# Altium PCB Final_back_up.PcbDoc
Units mm, origin at the board's own origin, x right, y up, seen from the top; angles counter-clockwise.
Board outline 52.21 x 45.1 mm, 2 copper layers (Top Layer, Bottom Layer); 32 components, 17 nets, 94 pads, 116 vias.
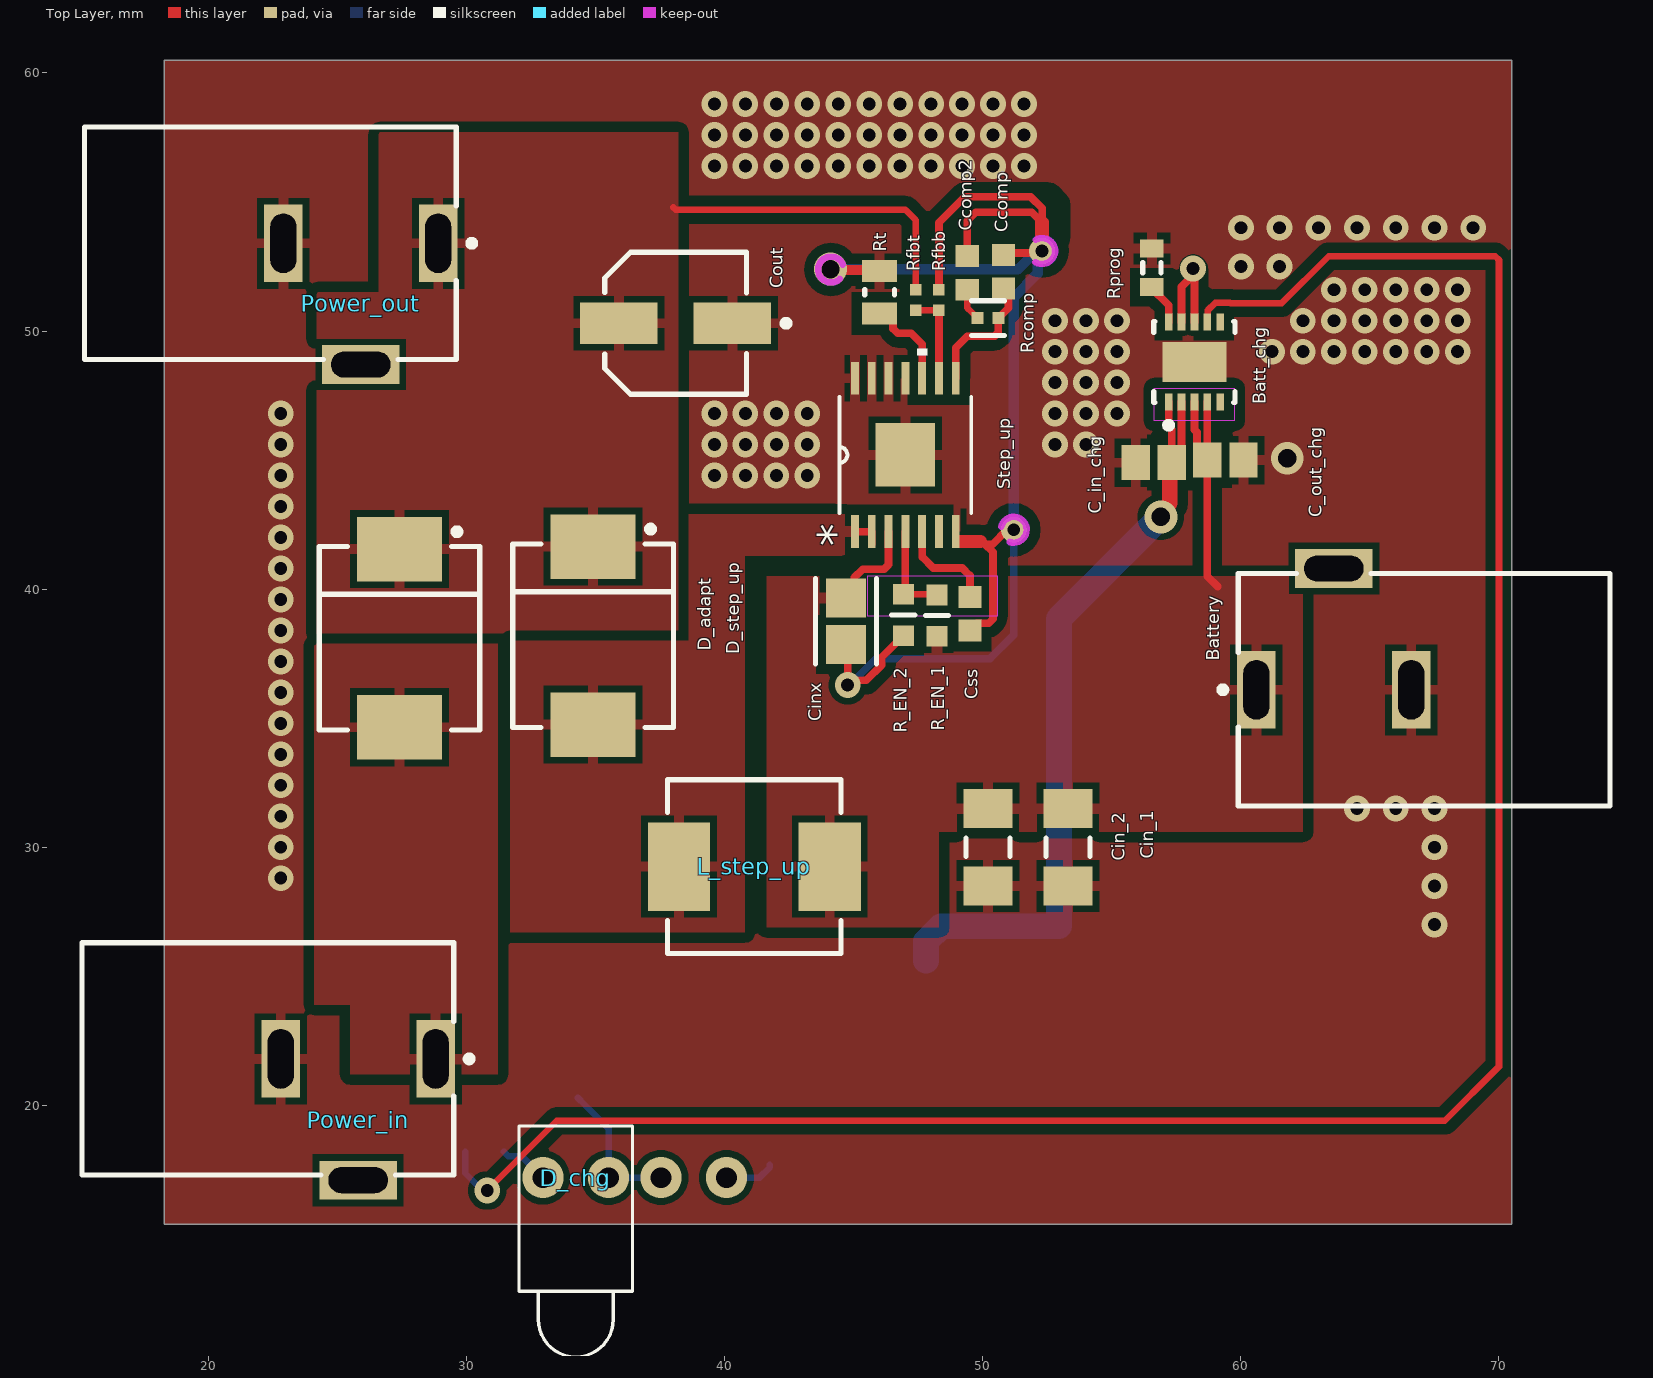
[diagram p0: Top Layer view]
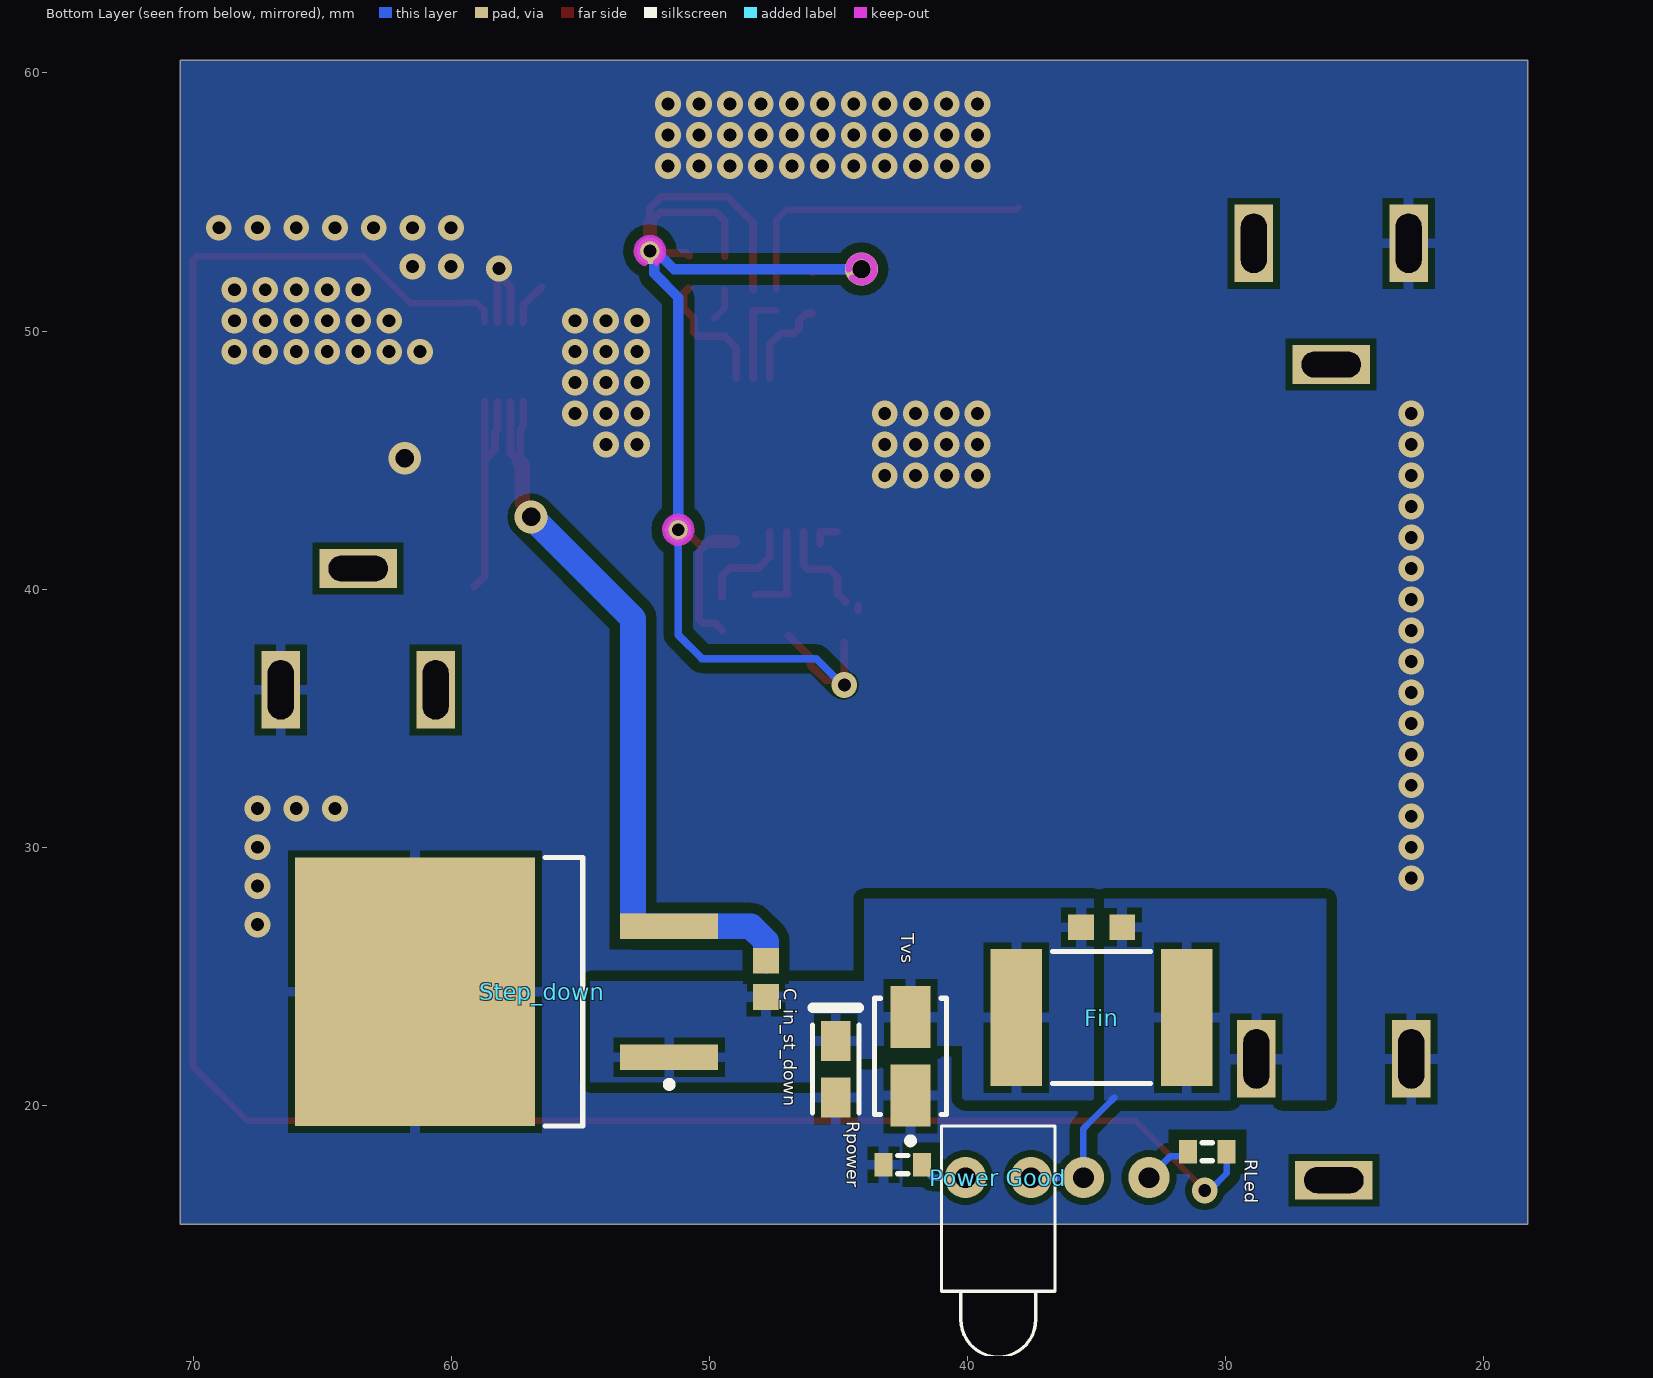
[diagram p1: Bottom Layer view, seen from below]

## Layer stack, top to bottom
Top Solder: solder mask 0.0102, Solder Resist, Dk 3.5
Top Layer: signal copper 0.0356
Dielectric 1: dielectric 0.32, FR-4, Dk 4.8
Bottom Layer: signal copper 0.0356
Bottom Solder: solder mask 0.0102, Solder Resist, Dk 3.5

## Board outline
18.288,15.4 70.5,15.4 70.5,60.5 18.288,60.5

## Design rules (kind name [scope] priority, off if disabled: settings)
Clearance [All] p1: gap=0.254 ignorepadtopadclearanceinfootprint=TRUE except(0: Text-Hole; 0.2: Arc-Arc Arc-Track Arc-SMDPad Track-Track Track-SMDPad SMDPad-SMDPad; 0.4: Arc-Fill Arc-Poly Arc-Region Track-Fill Track-Poly Track-Region SMDPad-Fill SMDPad-Poly SMDPad-Region Fill-Fill Fill-Poly Fill-Region Poly-Poly Poly-Region Region-Region)
PolygonConnect For_TOP_GND [HasFootprint('FP-C04-063-MFG')] p1: connectstyle=Direct reliefconductorwidth=0.254 reliefentries=4 polygonreliefangle="90 Angle" airgapwidth=0.254
PolygonConnect [All] p2: thpad.connectstyle=Relief thpad.reliefconductorwidth=0.4 thpad.reliefentries=4 thpad.polygonreliefangle="90 Angle" thpad.airgapwidth=0.254 smdpad.connectstyle=Relief smdpad.reliefconductorwidth=0.4 smdpad.reliefentries=4 smdpad.polygonreliefangle="90 Angle" smdpad.airgapwidth=0.254 via.connectstyle=Direct via.reliefconductorwidth=0.4 via.reliefentries=4 via.polygonreliefangle="90 Angle" via.airgapwidth=0.254
RoutingVias [All] p1: holewidth=0.711 width=1.27 viastyle="Through Hole" minholewidth=0.711 minwidth=1.27 maxholewidth=0.711 maxwidth=1.27
SolderMaskExpansion [All] p1: expansion=0.102 istentingtop=FALSE
Width [All] p1: maxlimit=2 minlimit=0.254 preferedwidth=0.254 minimp=50.000000 maximp=50.000000 favimp=50.000000
30 further rules are at their usual default settings.

## Components (designator, comment, footprint, x,y, rotation, side; value= is the part's Value field where it differs from the comment)
Batt_chg "MCP73213-A6SI/MF" FP-C04-063-MFG 58.2,48.8 r90 top
Battery "PJ-102BH" CUI-PJ-102BH_V 63.6,36.1 r0 top
C_in_chg "1uF (25V)" CAPC2013X140X50LL20T25 56.625,44.9 r0 top
C_in_st_down "T491A475K016AT" KEMT-A-3216-18-2_L 45.1,21.4 r270 bottom
C_out_chg "1uF (25V)" CAPC2013X140X50LL20T25 59.4,45 r180 top
Ccomp "06035C102KAT2A" CAPC1608X90X35LL15T15 50.8,52.3 r270 top
Ccomp2 "06035C102KAT2A" CAPC1608X90X35LL15T15 49.4,52.25 r270 top
Cin_1 "C1206C106K4RACTU" CAPC3216X180X50ML20T25 53.3,30 r90 top
Cin_2 "C1206C106K4RACTU" CAPC3216X180X50ML20T25 50.2,30 r90 top
Cinx "C0805C104M5RACTU" FP-C0805C-DN-IPC_A 44.7,38.75 r270 top value="0.10 μF"
Cout "2R5SVPE330MY" FP-SVPE-B6-MFG 38.1,50.3 r180 top value=330uF
Css "06035C102KAT2A" CAPC1608X90X35LL15T15 49.5,39.05 r90 top
D_adapt "B540C-13-F" FP-SMC-MFG 27.4,38.1 r270 top value=300pF
D_chg "LED1" LED-1 34.23,17.2 r270 top
D_step_up "B540C-13-F" FP-SMC-MFG 34.9,38.2 r270 top value=300pF
Fin "2920L150DR" LFUS-2920L150DR_V 34.8,23.4 r0 bottom
L_step_up "IHLP2525CZER3R3M01" FP-IHLP-2525CZ-FP_2_413x3-MFG 41.15,29.25 r180 top
"Power Good" "LED1" LED-1 38.8,17.2 r270 bottom
Power_in "PJ-102BH" CUI-PJ-102BH_V 25.8,21.8 r180 top
Power_out "PJ-102BH" CUI-PJ-102BH_V 25.9,53.4 r180 top
R_EN_1 "RC1608F9093CS" FP-RC1608-MFG 48.225,38.975 r270 top
R_EN_2 "RC1608F9093CS" FP-RC1608-MFG 46.925,39 r90 top
Rcomp "CRCW04020000Z0ED" FP-CRCW0402-e3-IPC_C 50.2,50.5 r180 top
Rfbb "ERJ2RKF1002X" RESC1005X40X25LL05T05 48.3,51.2 r270 top
Rfbt "ERJ2RKF1002X" RESC1005X40X25LL05T05 47.4,51.2 r90 top
RLed "1K" J1-0603 30.7,18.2 r180 bottom
Rpower "1K" J1-0603 42.5,17.7 r0 bottom
Rprog "3K" J1-0603 56.55,52.45 r90 top value=1K
Rt "CRCW08050000Z0EA" RESC2013X50X30LL20T20 46,51.5 r270 top
Step_down "L7808CD2T-TR" TO-263_N 57.85,24.4 r0 bottom
Step_up "TPS55340PWP" PWP14 47,45.2 r90 top
Tvs "SMAJ14CA-E3/61" VISH-DO-214AC-2_N 42.2,21.9 r90 bottom

## Footprints (in the part's own frame and the unit in brackets; to place one, negate y for a bottom-side part, rotate by r counter-clockwise, add the part's x,y. Pads: shape width x height; smd on the part's side, far side on the other; paste and mask are expansions set on the pad)
CAPC1608X90X35LL15T15 [mm] "Chip Capacitor, 2-Leads, Body 1.60x0.81mm, IPC High Density"
  rect 0.85x0.9 smd: 1(-0.65,0) 2(0.65,0)
  body extent -0.88,-0.48 0.87,0.48, height 0.9
CAPC2013X140X50LL20T25 [mm] "Chip Capacitor, 2-Leads, Body 2.00x1.25mm, IPC High Density"
  rect 1.1x1.35 smd: 1(-0.7,0) 2(0.7,0)
  body extent -1.1,-0.72 1.1,0.72, height 1.4
CAPC3216X180X50ML20T25 [mm] "Chip Capacitor, 2-Leads, Body 3.40x1.80mm, IPC Low Density"
  rect 1.5x1.9 smd: 1(-1.5,0) 2(1.5,0)
  silkscreen extent -0.35,-0.85 0.35,0.85, body extent -1.7,-0.9 1.7,0.9, height 1.8
CUI-PJ-102BH_V [mm] "THD, 3-Leads, Body 14.4x9mm, Height 11mm"
  rect 1.5x3 hole 1 slot 2.3 at 90 deg: 1(-3,0) 2(3,0)
  rect 3x1.5 hole 1 slot 2.3 at 0 deg: 3(0,4.7)
  silkscreen extent -4.42,-4.5 10.7,4.5, body extent -3.7,-4.5 10.7,4.9, height 11
FP-C04-063-MFG [mm]
  rect 0.65x0.3 smd paste+0 mask+0: 1(-1.55,1) 2(-1.55,0.5) 3(-1.55,0) 4(-1.55,-0.5) 5(-1.55,-1) 6(1.55,-1) 7(1.55,-0.5) 8(1.55,0) 9(1.55,0.5) 10(1.55,1)
  rect 1.55x2.48 smd paste+0 mask+0: 11(0,0)
  silkscreen extent -2.57,-1.58 1.57,1.58, body extent -1.97,-1.68 1.97,1.68, height 0.25
FP-C0805C-DN-IPC_A [mm]
  rect 1.505x1.556 smd paste+0 mask+0: 1(-0.901,0) 2(0.901,0)
  silkscreen extent -1.65,-1.18 1.65,1.18, body extent -2.15,-1.28 2.15,1.28, height 0.25
FP-CRCW0402-e3-IPC_C [mm]
  rect 0.468x0.472 smd paste+0 mask+0: 1(-0.402,0) 2(0.402,0)
  silkscreen extent -0.64,-0.67 0.64,0.67, body extent -0.74,-0.38 0.74,0.38, height 0.25
FP-IHLP-2525CZ-FP_2_413x3-MFG [mil]
  rect 95x135 smd paste+0 mask+0: 1(-115,0) 2(115,0)
  silkscreen extent -132,-132 132,132, body extent -166,-136 166,136, height 10
FP-RC1608-MFG [mm]
  rect 0.8x0.8 smd paste+0 mask+0: 1(-0.8,0) 2(0.8,0)
  silkscreen extent 0,-0.45 0,0.45, body extent -1.3,-0.55 1.3,0.55, height 0.25
FP-SMC-MFG [mm]
  rect 2.5x3.3 smd paste+0 mask+0: 1(-3.45,0) 2(3.45,0)
  silkscreen extent -4.25,-3.11 3.55,3.11, body extent -4.8,-3.21 4.8,3.21, height 0.25
FP-SVPE-B6-MFG [mm]
  rect 3x1.6 smd paste+0 mask+0: 1(-2.2,0) 2(2.2,0)
  silkscreen extent -4.4,-2.75 2.75,2.75, body extent -3.95,-3 3.95,3, height 0.25
J1-0603 [mm] "Chip Resistor, Body 1.6x0.8mm, IPC High Density"
  rect 0.7x0.9 smd: 1(-0.75,0) 2(0.75,0)
  silkscreen extent -0.2,-0.35 0.2,0.35, body extent -0.85,-0.48 0.85,0.48, height 0.9
KEMT-A-3216-18-2_L [mm] "Molded TAN Capacitor, 2-Leads, Body 3.4x1.8mm, IPC High Density"
  rect 1.55x1.15 smd: 1(-1.1,0) 2(1.1,0)
  silkscreen extent -2.37,-0.9 1.7,0.9, body extent -1.7,-0.9 1.7,0.9, height 1.8
LED-1 [mm] "LED; 2 Leads"
  round 1.6 hole 0.8: 1(0,1.27) 2(0,-1.27)
  silkscreen extent -2,-2.2 6.95,2.2
LFUS-2920L150DR_V [mm] "SMD, 2-Leads, Body 5.12x7.355mm"
  rect 2x5.3 smd: 1(-3.3,0) 2(3.3,0)
  silkscreen extent -1.9,-2.56 1.9,2.56, body extent -3.68,-2.56 3.68,2.56, height 1.25
PWP14 [mil]
  rect 50x12 smd: 1(-117,76.77) 2(-117,51.18) 3(-117,25.59) 4(-117,0) 5(-117,-25.59) 6(-117,-51.18) 7(-117,-76.77) 8(117,-76.77) 9(117,-51.18) 10(117,-25.59) 11(117,0) 12(117,25.59) 13(117,51.18) 14(117,76.77)
  rect 96.85x90.94 smd: 15(0,0)
  Top Layer region: 0,-45.47 0,-45.47 0,-45.47 0,-45.47 0,-45.47 0,-45.47 0,-45.47 0,-45.47
  Top Layer region: 0,45.47 0,45.47 0,45.47 0,45.47 0,45.47 0,45.47 0,45.47 0,45.47
  silkscreen extent -88,-100 162,100, body extent 0,0 10,10, height 10
RESC1005X40X25LL05T05 [mm] "Chip Resistor, 2-Leads, Body 1.05x0.55mm, IPC High Density"
  rect 0.45x0.45 smd: 1(-0.4,0) 2(0.4,0)
  body extent -0.53,-0.28 0.53,0.28, height 0.4
RESC2013X50X30LL20T20 [mm] "Chip Resistor, 2-Leads, Body 2.00x1.25mm, IPC High Density"
  rect 0.85x1.35 smd: 1(-0.825,0) 2(0.825,0)
  silkscreen extent -0.1,-0.58 0.1,0.58, body extent -1.1,-0.72 1.1,0.72, height 0.5
TO-263_N [mm] "D2-PAK, 4-Leads, Body 9.2x10.2mm, Pitch 2.54mm, Lead Span 15.4mm, IPC Medium Density"
  rect 3.8x1 smd: 1(-6.3,2.54) 3(-6.3,-2.54)
  rect 9.3x10.4 smd: 4(3.55,0)
  silkscreen extent -6.42,-5.2 -1.5,5.2, body extent -2.95,-5.2 6.4,5.2, height 4.6
VISH-DO-214AC-2_N [mm] "DO-214AC, 2-Leads, Body 4.5x2.79mm, IPC Medium Density"
  rect 2.4x1.55 smd: 1(-1.525,0) 2(1.525,0)
  silkscreen extent -3.4,-1.4 2.25,1.4, body extent -2.25,-1.4 2.25,1.39, height 2.29

## Part data
Batt_chg: library part CMP-0133-00131-2, "IC LI-ION/LI-POLY CTRLR 10-DFN", Case/Package=DFN, Drain to Source Resistance=350mR, Max Charge Current=1.1A, Max Input Voltage=18V, Max Operating Temperature=85°C, Max Output Voltage=8.85V, Max Supply Voltage=13V, Min Operating Temperature=-40°C, Min Output Voltage=8.15V, Min Supply Voltage=4.2V, Operating Supply Current=700uA, Output Voltage=8.4V, Package Quantity=120, Height=0.037inch, Lead Free="Lead Free", Length=0.118inch, Max Output Current=1.1A, Mount="Surface Mount", Number of Cells=2, Number of Channels=2, Number of Pins=10, Packaging=Rail/Tube, Radiation Hardening=No, REACH SVHC="No SVHC", Voltage Rating=8.85V, Width=0.118inch
Battery Power_in Power_out: library part CMP-2000-06901-1, "Through Hole Right Angle DC Power Jack, 5 A, 2.5 mm Center Pin, 3 Position, -25 to 85 degC, RoHS, Bulk", Current Rating=5A, Flammability Rating=UL94V-0, Insulation Resistance=100MOhms, Manufacturer=CUIInc., Operating Temperature Range=-25Cto+85C, Package Description="3-Pin Through Hole Device, Body 14.4 x 9 mm, Height 11 mm", Voltage Rating=24V, Brand=CUI, Connector Type=DCPowerJack, Contact Gender=Male, Contact Material=Copper, Contact Plating=Nickel, Datasheet URL=http://www.cui.com/product/resource/pj-102bh.pdf, Datasheet Version="Rev. 1.02, 05/2016", Factory Pack Quantity=280, Housing Material=PolybutyleneTerephthalate(PBT), Inside Contact Diameter=2.5mm, Manufacturer URL=http://www.cui.com/, Mounting Angle=Right, Mounting Style=ThroughHole, Mounting Technology=ThroughHole, Outside Contact Diameter=6.5mm, Package Reference=PJ-102BH, Product=Jacks, Product Category=DCPowerConnectors, RoHS=True, Termination Style=ThroughHole
C_in_chg C_out_chg: library part CMP-2007-03234-1, Manufacturer=Kemet, Part Number=C0805C105K3RACTU
C_in_st_down: library part CMP-2000-07188-1, "Tantalum Capacitor, 4.7 uF, +/- 10%, 16 V, -55 to 125 degC, 2-Pin Molded, RoHS, Tape and Reel", Capacity (elec.)=4.7µF, Manufacturer=Kemet, Nominal voltage=16V, Package Description="2-Pin Surface Mount Device, Body 3.2 x 1.6 mm", Package Reference=1206, Tolerance=10%, Category=Tantalumcapacitor, Content=1pc(s), Datasheet URL=https://datasheet.ciiva.com/11793/0900766b80718482-11793043.pdf, Datasheet Version=08/2014, Manufacturer URL=http://www.kemet.com/, Mounting Technology=SurfaceMount, Type=T491A475K016AT
Ccomp Ccomp2 Css: library part CMP-2006-04378-1, Manufacturer="AVX Interconnect / Elco", Part Number=06035C102KAT2A
Cin_1 Cin_2: library part CMP-1664-00006-1, "CAP, Ceramic, 10 uF, +/- 10%, 16 V, -55 to 125 degC, 1206 (3216 Metric), RoHS, Tape and Reel", Capacitance="8.2 pF", Case Code (Imperial)=0603, Case Code (Metric)=1608, Max Operating Temperature="125 degC", Min Operating Temperature="-55 degC", Package Quantity=4000, Tolerance=5%, Type (Capacitors)=C0G, Voltage Rating="50 V", Case\Package=0603, ComponentLink1Description="Manufacturer URL", ComponentLink1URL=http://www.kemet.com/, ComponentLink2Description=Datasheet, ComponentLink2URL=http://capacitoredge.kemet.com/capedge2/DataSheet/Datasheet-C1206C106K4RACTU.pdf?pn=C1206C106K4RACTU, DatasheetVersion=Aug-16, Height="0.8 mm", Length="1.6 mm", Mount="Surface Mount", PackageDescription="2-Pin Surface Mount Device, Body 3.2 x 1.6 mm", PackageReference=1206, Packaging="Tape and Reel", Pins=2, Radiation Hardening=No, REACH SVHC="No SVHC", RoHSCompliant=true, Voltage Rating (DC)="50 V", Width="0.8 mm"
Cinx: library part CMP-1036-04423-3, "CAP CER 0.1UF 50V X7R 0805", Capacitance="0.10 μF", Manufacturer=KEMET, Package=C0805C-DN, Temperature="-55°C to +125°C", Temperature Characteristic=X7R, Temperature Coefficient=30ppm/°C, Temperature Range High=+125°C, Temperature Range Low=-55°C, Tolerance=0.2, Voltage Rating="50 V", Automotive=No, Category=Cap, ComponentLink2Description=Datasheet, ComponentLink2URL=https://content.kemet.com/datasheets/KEM_C1003_C0G_SMD.pdf, Device Class L1="Passive Components", Device Class L2=Capacitors, Device Class L3="Ceramic Capacitors", Digikey Description="CAP CER 0.1UF 50V X7R 0805", Height=0.88mm, Ipc Land Pattern Name=CAPC200125X78, Lead Free=Yes, Manufacturer Part Number=C0805C104M5RACTU, Material=Ceramic, Mouser Description="Multilayer Ceramic Capacitors MLCC - SMD/SMT 50volts 0.1uF X7R 20%", Octopart=https://octopart.com/c0805c104m5ractu-kemet-129379, RoHS=TRUE
Cout: library part CMP-05428-000004-1, "CAP ALUM POLY 330UF 20% 2.5V SMD", Capacitance=330uF, Leakage Current=500uA, Manufacturer=Panasonic, Package=SVPE-B6, Ripple Current=3860mA, Temperature="-55°C to +105°C", Temperature Range High=+105°C, Temperature Range Low=-55°C, Tolerance=20%, Voltage Rating=2.5V, Automotive=No, Category=Cap, ComponentLink2Description=Datasheet, ComponentLink2URL=https://industrial.panasonic.com/cdbs/www-data/pdf/AAB8000/AAB8000C179.pdf, Device Class L1="Passive Components", Device Class L2=Capacitors, Device Class L3="Polymer Capacitors", Digikey Description="CAP ALUM POLY 330UF 20% 2.5V SMD", Dissipation Factor=12%, ESR=10mΩ, Footprint Url=https://industrial.panasonic.com/cdbs/www-data/pdf/AAB8000/AAB8000COL10.pdf, Height=6mm, Lead Free=Yes, Life=2000Hours, Manufacturer Part Number=2R5SVPE330MY, Material=Polymer, Mouser Description="Cap Aluminum Polymer 330uF 2.5VDC 20% (5 X 5.9mm) SMD 0.01 Ohm 3860mA 2000h 105C T/R", Octopart=https://octopart.com/2r5svpe330my-panasonic-29498404, RoHS=TRUE
D_adapt D_step_up: library part CMP-2000-05097-3, "DIODE SCHOTTKY 40V 5A SMC", Capacitance=300pF, Forward Current=5A, Manufacturer="Diodes Inc.", Max Junction Temp=+150°C, Max Repetitive Reverse Voltage=40V, Max Surge Forward Current=100A, Package=SMC, Peak Reverse Current=0.5mA, Temperature="-55°C to +150°C", Temperature Range Low=-55°C, Automotive=No, Automotive Grade=NA, Category=Diode, ComponentLink2Description=Datasheet, ComponentLink2URL=https://www.diodes.com/assets/Datasheets/ds13012.pdf, Device Class L1="Discrete Semiconductors", Device Class L2=Diodes, Device Class L3="Schottky Diodes", Digikey Description="DIODE SCHOTTKY 40V 5A SMC", Footprint Url=https://www.diodes.com/assets/Package-Files/SMC.pdf, Height=2.5mm, Lead Free=Yes, Manufacturer Part Number=B540C-13-F, Mouser Description="Diode: Schottky rectifying; SMD; 40V; 5A; SMC; Package: reel, tape", Octopart=https://octopart.com/b540c-13-f-diodes+inc.-325873, Reverse Voltage=40V, RoHS=TRUE, Standoff Height=0.1mm, Temperature Range High=+150°C
D_chg "Power Good": "Typical RED GaAs LED", LatestRevisionDate=08-Jul-2005, LatestRevisionNote="Mech Layer 1 removed.", PackageDescription="LED; 2 Leads", PackageReference=LED-1, Published=8-Jun-2000, Publisher="Altium Limited"
Fin: library part CMP-2000-05549-1, "Poly-Fuse(R) Resettable PTC, 33 V, 40 A, -40 to 85 degC, 2-Pin SMD, RoHS, Tape and Reel", Hold Current [Ih]=1.5A, Manufacturer=Littelfuse, Operating Temp Range=-40to+85°C, Package Description="2-Pin Surface Mount Device, Body 5.12 x 7.355 mm", Trip Current=3A, Working Voltage-Max=33V, Datasheet URL=http://www.littelfuse.com/~/media/electronics/datasheets/resettable_ptcs/littelfuse_ptc_2920l_datasheet.pdf.pdf, Datasheet Version=07/2016, Manufacturer URL=http://www.littelfuse.com/, Mounting Technology=SurfaceMount, Package Reference=2920L150DR, Size=2920
L_step_up: library part CMP-2000-06443-2, "Commercial Inductors, High Saturation Series 3.3uH 6A 30mΩ 20%", Case/Package=2525, Current Rating=6A, DC Resistance (DCR)=30mR, Inductance=3.3uH, Inductance Tolerance=20%, Max Operating Temperature=125°C, Min Operating Temperature=-55°C, Package Quantity=2000, Saturation Current=13.5A, Self Resonant Frequency=5MHz, Test Frequency=100kHz, Core Material=Metal, Depth=6.72mm, Height=3mm, Height - Seated (Max)=0.118inch, Lead Free="Lead Free", Length=6.47mm, Max DC Current=6A, Military Standard=Not, Mount="Surface Mount", Number of Pins=2525, Packaging="Tape and Reel", Radiation Hardening=No, RMS Current (Irms)=6A, Shielding=Shielded, Termination=SMD/SMT, Tolerance=20%, Width=6.47mm
R_EN_1 R_EN_2: library part CMP-13261-004639-1, "Res Thick Film 0603 909kΩ 1% 0.1W ±100ppm/°C Molded SMD T/R", Case Code (Imperial)=0603, Case Code (Metric)=1608, Max Operating Temperature=155°C, Max Power Dissipation=100mW, Min Operating Temperature=-55°C, Package Quantity=1, Resistance=909kR, Temperature Coefficient=100ppm/°C, Tolerance=1%, Voltage Rating (DC)=50V, Case/Package=0603, Composition="Thick Film", Depth=0.8mm, Features="Moisture Resistant", Height=0.022inch, Lead Free="Lead Free", Length=0.063inch, Military Standard=Not, Number of Terminations=2, Packaging="Tape and Reel", Power Rating=100mW, Width=0.031inch
Rcomp: library part CMP-2002-08122-2, "RES Thick Film, 0Ω, 0.063W, 0402", Case Code (Imperial)=0402, Case Code (Metric)=1005, Max Operating Temperature=155°C, Max Power Dissipation=63mW, Min Operating Temperature=-55°C, Package Quantity=1, Resistance=0mR, Temperature Coefficient=100ppm/°C, Tolerance=5%, Voltage Rating=50V, Case/Package=0402, Composition="Thick Film", Contact Plating=Tin, Depth=0.5mm, Features="Automotive AEC-Q200", Height=0.35mm, Lead Free="Lead Free", Length=1mm, Military Standard=Not, Mount="Surface Mount", Number of Terminations=2, Packaging="Tape and Reel", Power Rating=63mW, Radiation Hardening=No, Termination=SMD/SMT, Voltage Rating (DC)=50V, Weight=2.3E-05oz, Width=0.5mm
Rfbb Rfbt: library part CMP-2000-07588-1, "Chip Resistor, 10 KOhm, +/- 1%, 0.1 W, -55 to 155 degC, 0402 (1005 Metric), RoHS, Tape and Reel", Case Code (Imperial)=0402, Case Code (Metric)=1005, Manufacturer=Panasonic, Max Operating Temperature=155degC, Max Power Dissipation=100mW, Min Operating Temperature=-55degC, Package Description="2-Pin Surface Mount Device, Body 1 x 0.5 mm", Package Quantity=1, Package Reference=402, Resistance=10KOhm, Temperature Coefficient=100ppm\/degreesC, Tolerance=1%, Voltage Rating=50V, Case\/Package=0402, Composition=ThickFilm, Contact Plating=Tin, Datasheet URL=https://industrial.panasonic.com/cdbs/www-data/pdf/RDA0000/AOA0000C304.pdf, Datasheet Version=02/2017, Depth=0.5mm, Height=0.35mm, Lead Free=LeadFree, Length=1mm, Manufacturer URL=http://www.panasonic.com/, Military Standard=Not, Mount=SurfaceMount, Mounting Technology=SurfaceMount, Number of Pins=2, Number of Terminations=2, Packaging=TapeandReel, Power Rating=100mW, Radiation Hardening=No, REACH SVHC=NoSVHC, RoHSCompliant=True, Termination=SMD/SMT, Voltage Rating (DC)=50V, Width=0.02inch
RLed Rpower Rprog: library part Res3, "Resistor", LatestRevisionDate=29-May-2009, LatestRevisionNote="IPC-7351 Footprint Added.", PackageDescription="Chip Resistor", PackageReference=J1-0603, Published=8-Jun-2000, Publisher="Altium Limited"
Rt: library part CMP-2001-04896-1, Manufacturer="Vishay Dale", Part Number=CRCW08050000Z0EA
Step_down: library part CMP-0244-00209-1, "Positive Voltage Regulator, 3-Pin D2PAK, Tape and Reel", ComponentLink1Description="Manufacturer URL", ComponentLink1URL=http://www.st.com, ComponentLink2Description=Datasheet, ComponentLink2URL=http://www.st.com/internet/com/TECHNICAL_RESOURCES/TECHNICAL_LITERATURE/DATASHEET/CD00000444.pdf, DatasheetVersion=16/11/2011, PackageDescription="3-Pin Transistor Outline Package 2.54 mm Pitch, 15.4 mm Lead Span (D2PAK)", PackageReference=TO-263, PackageVersion=2011
Step_up: "No Description Available", Copyright="Copyright (C) 2018 Accelerated Designs. All rights reserved", Manufacturer_Part_Number=TPS55340PWP, RefDes=RefDes, Type=DEV, Vendor="TEXAS INSTRUMENTS"
Tvs: library part CMP-0548-00182-2, "Transient Voltage Suppressor, 6.40 to 231 V, 14 V Stand-off Voltage, Bi-Directional, -55 to 155 degC, 2-pin DO-214AC, Pb-Free, Tape and Reel", Manufacturer="Vishay Semiconductor", Operating Junction and Storage Temperature Range="-55 to 150 degC", ComponentLink1Description="Manufacturer URL", ComponentLink1URL=http://www.vishay.com/, ComponentLink2Description=Datasheet, ComponentLink2URL=http://www.vishay.com/docs/88390/smaj50a.pdf, ComponentLink3Description="Package Specification", ComponentLink3URL=http://www.vishay.com/docs/88390/smaj50a.pdf, DatasheetVersion=12/8/2013, ID (uA)=2, IFSM="40 A", Mounting Technology="Surface Mount", PackageDescription="2-Pin DO-214AC (SMA), Body 4.245 x 2.665 mm", PackageReference=DO-214AC-2, Packing="Tape and Reel", PartNumber=SMAJ14CA-E3/61, PPPM (W)="400, 300", RoHS=TRUE, VBR Bi-Directional (V)="6.4 to 231", VWM (V)=14

## Free pads (board coordinates)
  rect 1x1 smd far side: 2(34,26.9) 2(35.6,26.9) 4(47.8,24.2) 4(47.8,25.6)

## Via types
v1: diameter 1, hole 0.5, Top Layer to Bottom Layer, tented both sides, 81 vias
v2: diameter 1/1 (per signal layer), hole 0.5, Top Layer to Bottom Layer, tented both sides, 32 vias
v3: diameter 1.27, hole 0.711, Top Layer to Bottom Layer, tented both sides, 3 vias

## Nets (pads, with @x,y where several pads share a name; then routed paths per layer and width w, separated by ;. In a path a pad name is that pad's centre, name@x,y a point inside that pad or via, vN(x,y) a via of type N, cw(c..) or ccw(c..) an arc to the next point about the centre after c; other vN are vias at no path point)
+9: Batt_chg.1 Batt_chg.2 C_in_chg.2 pad.4@47.8,25.6 Step_down.3 | length 30.8
  Top Layer w0.3: Batt_chg.1 57.2,46.312 57.325,46.187 C_in_chg.2 57.7,45.275 Batt_chg.2
  Top Layer w0.6: v3(56.9,42.8) 56.9,42.981 57.244,43.325 57.244,44.819 C_in_chg.2
  Bottom Layer w1: pad.4@47.8,25.6 47.8,26.354 48.386,26.94 52.95,26.94 52.95,38.85 v3(56.9,42.8)
+12: "Power Good.1" D_adapt.2 D_chg.1 Fin.1 pad.2@34,26.9 Power_in.1 | length 5.6
  Bottom Layer w0.254: 34.3,20.3 34.6,20 35.2,19.4 35.5,19.1 D_chg.1 37.53,17.2
Battery_op: Batt_chg.3 Batt_chg.4 Battery.1 C_out_chg.2 Cin_1.2 Cin_2.2 Cinx.1 L_step_up.1 R_EN_1.2 Step_up.3 | length 13.9
  Top Layer w0.3: Cinx.1@44.225,39.175 Cinx.1@44.225,39.375 ; Cinx.1@44.7,39.5 45.025,39.825 45.025,40.45 45.35,40.775 46.172,40.775 46.348,40.951 46.348,42.226 Step_up.3 ; Batt_chg.3 58.2,46.175 58.3,46.075 58.3,45.4 C_out_chg.2 ; Batt_chg.4 C_out_chg.2 ; 59.1,40.1 58.7,40.5 C_out_chg.2
Comp: Ccomp2.2 Rcomp.2 | length 1.3
  Top Layer w0.254: Ccomp2.2 49.4,50.898 49.549,50.749 49.551,50.749 49.798,50.502 Rcomp.2
EN: R_EN_1.1 R_EN_2.2 Step_up.4 | length 3.5
  Top Layer w0.254: R_EN_2.2 48.2,39.8 R_EN_1.1
  Top Layer w0.3: R_EN_2.2@46.998,40.002 Step_up.4@46.998,42.226
Feedback: Rfbb.2 Rfbt.1 Step_up.9 | length 3.5
  Top Layer w0.254: Rfbt.1 Rfbb.2
  Top Layer w0.3: Step_up.9 Rfbb.2
GND: Batt_chg.8 Batt_chg.9 Batt_chg.11 Battery.2 C_in_chg.1 C_in_st_down.2 C_out_chg.1 Ccomp2.1 Ccomp.1 Cin_1.1 Cin_2.1 Cinx.2 Cout.1 Css.1 Power_in.2 Power_out.2 R_EN_2.1 Rfbb.1 Rpower.2 Rprog.2 Rt.1 Step_down.4 Step_up.7 Step_up.11 Step_up.12 Step_up.13 Step_up.14 Step_up.15 Tvs.1 | length 64.4
  Top Layer w0.3: Cinx.2@44.765,37.935 v1(44.765,36.281) 44.95,36.466 45.484,36.466 46.08,37.062 46.08,37.355 R_EN_2.1 ; Rfbb.1 48.3,54.2 49.3,55.2 51.85,55.2 52.3,54.75 52.3,54.35 52.415,54.235 52.415,53.215 v1(52.3,53.1) ; Ccomp2.1 49.4,54.266 49.734,54.6 51.9,54.6 52.165,54.335 52.165,53.235 v1(52.3,53.1) ; Css.1 49.775,38.675 50.224,38.675 50.4,38.851 50.4,41.424 50.081,41.743 50.381,41.743 v1@50.938,42.3 ; Ccomp.1@50.775,52.925 Ccomp.1 50.825,52.95 50.9,53.025 52.225,53.025 v1(52.3,53.1) ; Batt_chg.9 57.7,51 57.7,51.713 58.15,52.163 v1(58.15,52.425) 58.2,52.375 Batt_chg.8
  Top Layer w0.4: v3(44.1,52.4) 44.138,52.362 45.963,52.362 Rt.1
  Top Layer w0.5: Step_up.7@49.048,41.843 49.908,41.843
  Bottom Layer w0.3: v1(44.765,36.281) 44.831,36.281 45.85,37.3 50.275,37.3 51.2,38.225 v1(51.2,42.3)
  Bottom Layer w0.4: v3(44.1,52.4) 51.365,52.4 52.065,53.1 v1(52.3,53.1) 52.134,52.934 52.134,52.234 51.2,51.3 v1(51.2,42.3)
  other v1: 67.5,27 67.5,28.5 22.8,28.8 22.8,30 67.5,30 22.8,31.2 64.5,31.5 66,31.5 67.5,31.5 22.8,32.4 22.8,33.6 22.8,34.8 22.8,36 22.8,37.2 22.8,38.4 22.8,39.6 22.8,40.8 22.8,42 22.8,43.2 22.8,44.4 39.6,44.4 40.8,44.4 42,44.4 43.2,44.4 22.8,45.6 39.6,45.6 40.8,45.6 42,45.6 43.2,45.6 22.8,46.8 39.6,46.8 40.8,46.8 42,46.8 43.2,46.8 60,52.5 61.5,52.5 60,54 61.5,54 63,54 64.5,54 66,54 67.5,54 69,54 39.6,56.4 40.8,56.4 42,56.4 43.2,56.4 44.4,56.4 45.6,56.4 46.8,56.4 48,56.4 49.2,56.4 50.4,56.4 51.6,56.4 39.6,57.6 40.8,57.6 42,57.6 43.2,57.6 44.4,57.6 45.6,57.6 46.8,57.6 48,57.6 49.2,57.6 50.4,57.6 51.6,57.6 39.6,58.8 40.8,58.8 42,58.8 43.2,58.8 44.4,58.8 45.6,58.8 46.8,58.8 48,58.8 49.2,58.8 50.4,58.8 51.6,58.8
  other v2: 52.8,45.6 54,45.6 52.8,46.8 54,46.8 55.2,46.8 52.8,48 54,48 55.2,48 52.8,49.2 54,49.2 55.2,49.2 61.2,49.2 62.4,49.2 63.6,49.2 64.8,49.2 66,49.2 67.2,49.2 68.4,49.2 52.8,50.4 54,50.4 55.2,50.4 62.4,50.4 63.6,50.4 64.8,50.4 66,50.4 67.2,50.4 68.4,50.4 63.6,51.6 64.8,51.6 66,51.6 67.2,51.6 68.4,51.6
  other v3: 61.8,45.075
Load: Cout.2 D_adapt.1 D_step_up.1 Power_out.1 Rfbt.2 | length 12.3
  Top Layer w0.254: 38,54.8 38.1,54.7 47,54.7 47.4,54.3 Rfbt.2
NetBatt_chg_7: Batt_chg.7 RLed.2 | length 87.1
  Top Layer w0.254: v1(30.8,16.7) 30.8,16.71 33.49,19.4 67.9,19.4 70,21.5 70,52.751 69.851,52.9 63.4,52.9 61.575,51.075 59.601,51.075 59.576,51.1 59.013,51.1 58.723,50.81 58.723,50.373 Batt_chg.7
  Bottom Layer w0.254: RLed.2 29.95,17.369 30.619,16.7 v1(30.8,16.7)
NetC_in_st_down_1: C_in_st_down.1 Fin.2 pad.2@35.6,26.9 pad.4@47.8,24.2 Step_down.1 Tvs.2
NetCcomp_2: Ccomp.2 Rcomp.1 Step_up.8 | length 5
  Top Layer w0.3: Step_up.8 48.95,49.35 49.4,49.8 50.451,49.8 50.6,49.949 50.6,50.498 Rcomp.1 50.602,50.502 51,50.9 51,51.45 Ccomp.2
NetD_chg_2: D_chg.2 RLed.1 | length 1.9
  Bottom Layer w0.254: RLed.1 31.615,18.035 32.125,18.035 D_chg.2
NetD_step_up_2: D_step_up.2 L_step_up.2 Step_up.1 Step_up.2 | length 1.1
  Top Layer w0.3: Step_up.1 Step_up.2 Step_up.2@45.7,41.746
"NetPower Good_2": "Power Good.2" Rpower.1 | length 1.9
  Bottom Layer w0.254: 40.07,17.2 41.35,17.2 41.75,17.6 Rpower.1
NetRt_2: Rt.2 Step_up.10 | length 3.6
  Top Layer w0.3: Rt.2 46.25,50.675 46.525,50.4 46.525,50.092 46.701,49.916 47.225,49.916 47.65,49.491 Step_up.10
Prog: Batt_chg.10 Rprog.1 | length 1.6
  Top Layer w0.3: Rprog.1@56.5,51.7 57.2,51 Batt_chg.10
SS: Css.2 Step_up.5 | length 4
  Top Layer w0.3: Step_up.5 47.652,42.226 47.652,41.248 48.083,40.817 49.208,40.817 49.5,40.525 Css.2
pads on no net: Batt_chg.5 Batt_chg.6 Battery.3 Power_in.3 Power_out.3 Step_up.6

## Polygon pours and split planes (outlines as drawn)
GND on Bottom Layer "Btm_GND" (solid, pour order 7): 18.3,15.4 18.3,60.5 70.4,60.5 70.5,60.6 70.5,15.4
NetC_in_st_down_1 on Bottom Layer "+12 Fused" (solid, pour order 1): 35,28 35,20.2 40.1,20.2 40.2,20.3 40.2,22.3 43.6,22.3 43.6,21.8 46,21.8 46,20.9 54.6,20.9 54.6,24.8 44,24.8 44,28
+12 on Bottom Layer "+12v_in_poly" (solid, remove dead copper, pour order 0): 26.1,20.2 26.1,28 34.7,28 34.7,20.2 27.6,20.2
GND on Top Layer "Top_gnd" (solid, remove dead copper, pour order 9): 18.288,15.4 18.288,60.5 70.5,60.5 70.5,15.4
GND on Top Layer "Step_up_poly" (solid, pour order 2): 44.3,47.1 49.7,47.1 49.7,43.3 44.3,43.3
Battery_op on Top Layer "NONET_L02_P-001" (solid, remove dead copper, pour order 4): 41.625,40.5 41.625,26.9 48.3,26.9 48.3,30.6 62.4,30.6 62.4,38.2 62.4,40.5
NetD_step_up_2 on Top Layer "SW" (solid, pour order 3): 40.775,33.5 40.775,41.3 46,41.3 46,42.9 38.6,42.9 38.6,38 31.7,38 31.7,26.7 40.775,26.7
+12 on Top Layer "Vext_ply" (solid, pour order 6): 24.1,38 24.1,23.9 25.5,23.9 25.5,21.2 31.2,21.2 31.2,38
Load on Top Layer "Load" (solid, pour order 5): 38,38.3 37.9,38.3 24.2,38.3 24.2,51.4 24.1,51.5 26.6,51.5 26.6,57.6 26.5,57.7 38.2,57.7 38.2,38.3

## Keep-outs
Top Layer:
  rectangle: 45.525,38.975 50.575,40.5
  region: 56.65,47.775 59.75,47.775 59.75,46.525 56.65,46.525
  lines w0.254: 44.46,52.016 cw(c44.119,52.381) 44.582,52.57 ; 50.715,42.421 cw(c51.2,42.3) 51.038,41.827 ; 52.043,52.671 ccw(c52.3,53.1) 52.045,53.53
Bottom Layer:
  lines w0.254: 44.463,52.056 cw(c44.1,52.4) 44.6,52.4 ; 51.289,42.792 ccw(c51.2,42.3) 51.312,42.787 ; 52.048,52.668 cw(c52.3,53.1) 52.507,52.645

## Text inside footprints (layer, text, board x,y; h text height)
Step_up: Top 3D Body "*" at 44.872,41.657 h1.27 r90; Top Overlay "*" at 44.872,41.657 h1.27 r90; Mechanical 7 "0.03in/0.762mm" at 52.601,40.158 h0.64 r90; Mechanical 7 "0.025591in/0.65mm" at 45.692,33.783 h0.64 r90; Mechanical 7 "0.201in/5.105mm" at 47.318,50.496 h0.64 r90; Mechanical 7 "0.26in/6.604mm" at 40.129,42.978 h0.64 r90; Mechanical 7 "0.177in/4.496mm" at 42.034,42.819 h0.64 r90; Mechanical 7 "Alt 2 Padstyle: OX229Y152D76P" at 60.729,35.993 h1.27 r90; Mechanical 7 "Alt 1 Padstyle: OX152Y229D76P" at 59.205,35.993 h1.27 r90; Mechanical 7 "Heat Tab Padstyle: RX246Y231D0T" at 57.681,35.358 h1.27 r90; Mechanical 7 "Pin One Padstyle: RX127Y30D0T" at 56.157,35.993 h1.27 r90; Mechanical 7 "Default Padstyle: RX127Y30D0T" at 54.633,35.993 h1.27 r90